# EAGLE board cpc_ram1mb_plcc84 (EAGLE 6.4)
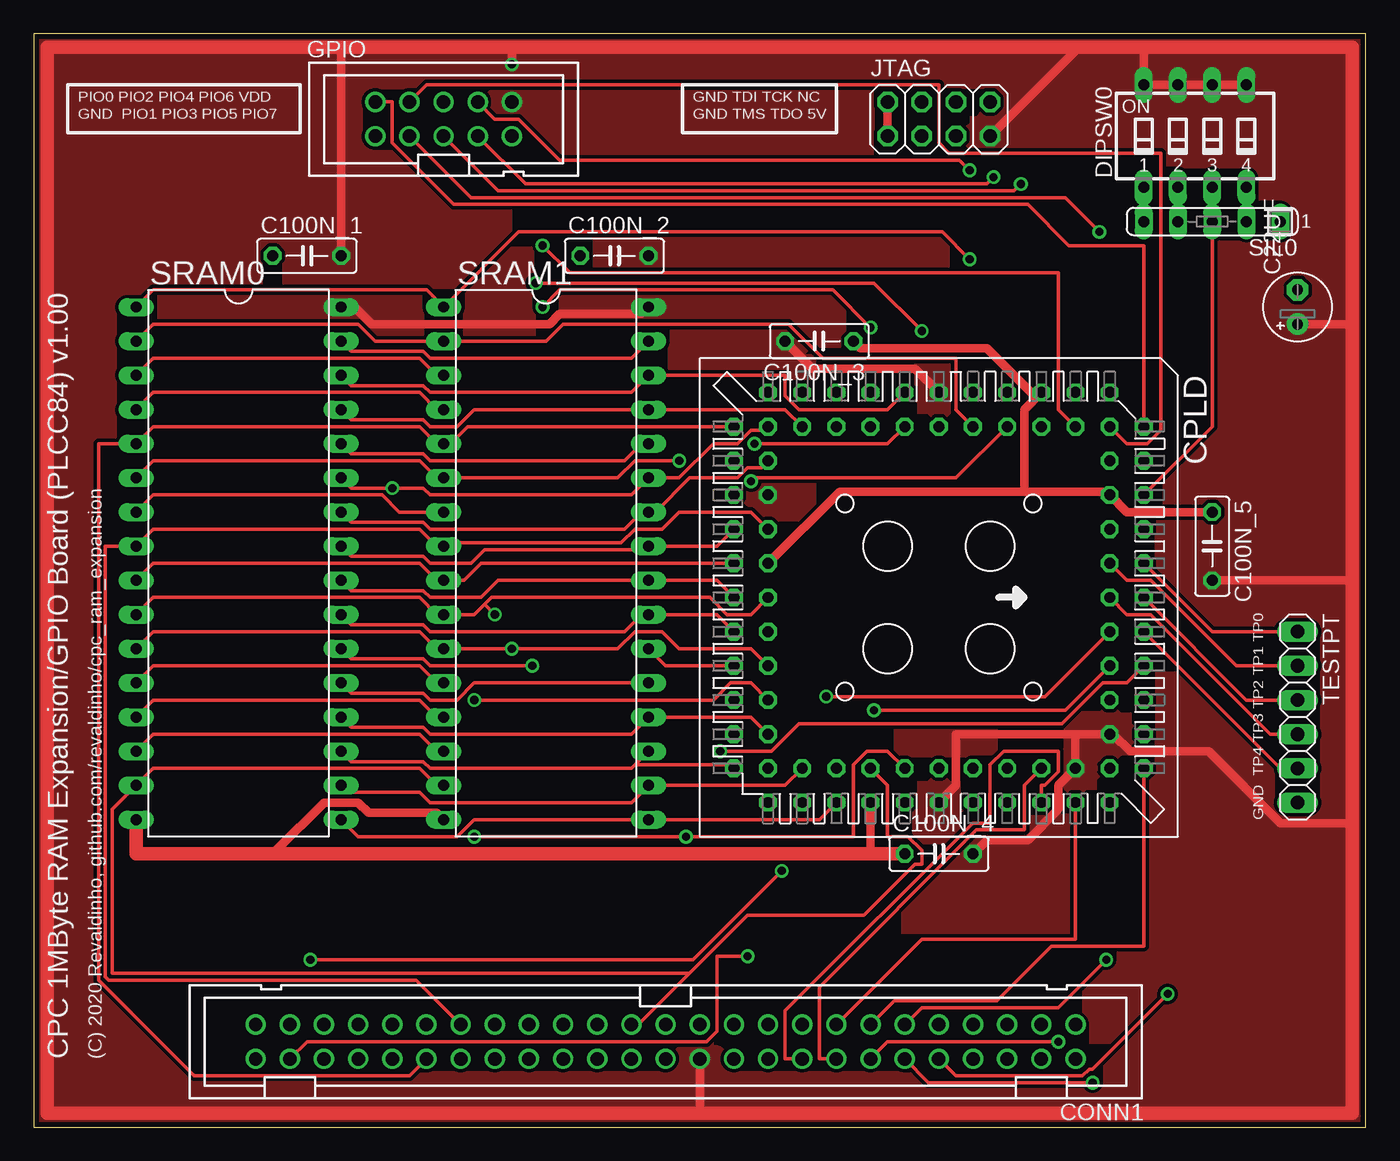
[diagram p0: board, top side]
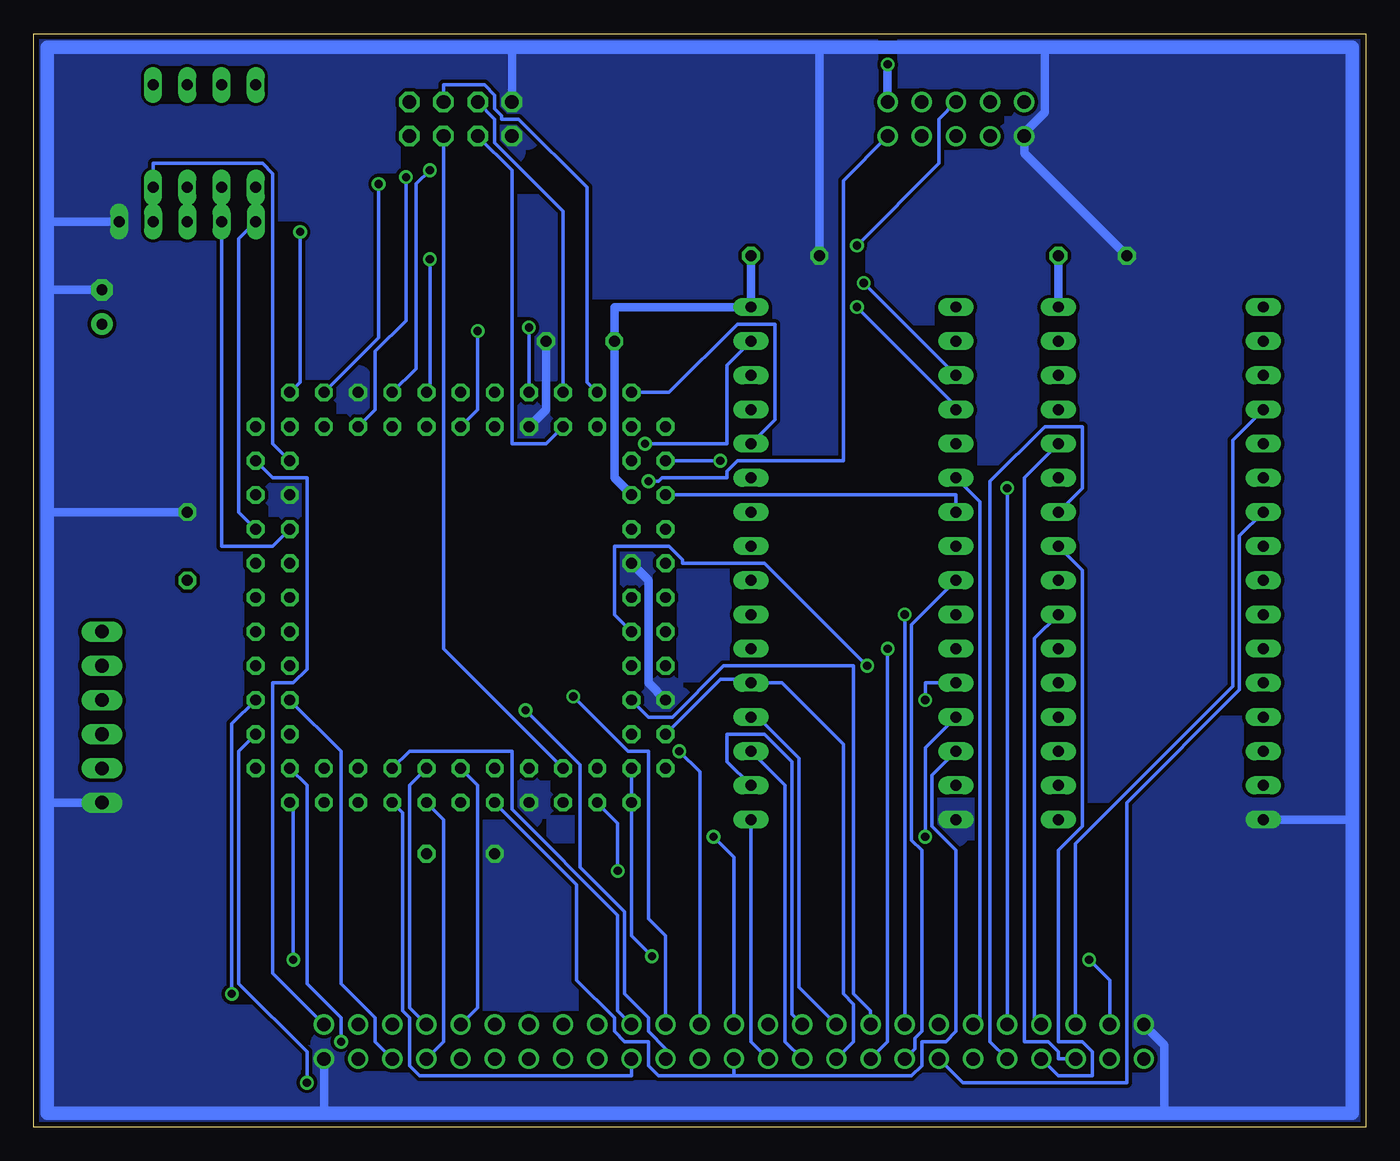
[diagram p1: board, bottom side, seen from below]

Size 99.06 x 81.28 mm. Coordinates in mm from the lower left corner, seen from the top.
Outline: 0,0 99.06,0 99.06,81.28 0,81.28 0,0
Copper layers (1*16): Top 0.035mm / dielectric 1.5mm / Bottom 0.035mm
Design rules "design_rules": minimum track width 10mil, minimum drill 24mil, track to track 10mil, track to pad 10mil, pad to pad 10mil, via to via 10mil, smd to smd 8mil, copper to edge 15mil, drill to drill 10mil, minimum pad ring 10mil, minimum via ring 8mil, stop-mask expansion 4mil, vias tented up to drill 0mil, thermal gap 10mil
Net classes: 0 signal: width 0.254 mm, clearance 0.254 mm; 1 supply: width 0.635 mm, clearance 0.254 mm

## Footprints (pad centres in the part's own frame; a part is rotated, then mirrored left to right if it is on the bottom)
E2,5-5 = drill 0.813 pad 1.6: + -1.27,0 | drill 0.813 pad 1.6 octagon: - 1.27,0
C050-025X075 = drill 0.813 octagon: 1 -2.54,0; 2 2.54,0
PAK100/2500-50 = drill 1 pad 1.422: 1 -30.48,-1.27; 2 -30.48,1.27; 3 -27.94,-1.27; 4 -27.94,1.27; 5 -25.4,-1.27; 6 -25.4,1.27; 7 -22.86,-1.27; 8 -22.86,1.27; 9 -20.32,-1.27; 10 -20.32,1.27; 11 -17.78,-1.27; 12 -17.78,1.27; 13 -15.24,-1.27; 14 -15.24,1.27; 15 -12.7,-1.27; 16 -12.7,1.27; 17 -10.16,-1.27; 18 -10.16,1.27; 19 -7.62,-1.27; 20 -7.62,1.27; 21 -5.08,-1.27; 22 -5.08,1.27; 23 -2.54,-1.27; 24 -2.54,1.27; 25 0,-1.27; 26 0,1.27; 27 2.54,-1.27; 28 2.54,1.27; 29 5.08,-1.27; 30 5.08,1.27; 31 7.62,-1.27; 32 7.62,1.27; 33 10.16,-1.27; 34 10.16,1.27; 35 12.7,-1.27; 36 12.7,1.27; 37 15.24,-1.27; 38 15.24,1.27; 39 17.78,-1.27; 40 17.78,1.27; 41 20.32,-1.27; 42 20.32,1.27; 43 22.86,-1.27; 44 22.86,1.27; 45 25.4,-1.27; 46 25.4,1.27; 47 27.94,-1.27; 48 27.94,1.27; 49 30.48,-1.27; 50 30.48,1.27
PLCC-S84-SOCKET = drill 0.813 octagon: 1 0,15.24; 2 0,12.7; 3 -2.54,15.24; 4 -2.54,12.7; 5 -5.08,15.24; 6 -5.08,12.7; 7 -7.62,15.24; 8 -7.62,12.7; 9 -10.16,15.24; 10 -10.16,12.7; 11 -12.7,15.24; 12 -15.24,12.7; 13 -12.7,12.7; 14 -15.24,10.16; 15 -12.7,10.16; 16 -15.24,7.62; 17 -12.7,7.62; 18 -15.24,5.08; 19 -12.7,5.08; 20 -15.24,2.54; 21 -12.7,2.54; 22 -15.24,0; 23 -12.7,0; 24 -15.24,-2.54; 25 -12.7,-2.54; 26 -15.24,-5.08; 27 -12.7,-5.08; 28 -15.24,-7.62; 29 -12.7,-7.62; 30 -15.24,-10.16; 31 -12.7,-10.16; 32 -15.24,-12.7; 33 -12.7,-15.24; 34 -12.7,-12.7; 35 -10.16,-15.24; 36 -10.16,-12.7; 37 -7.62,-15.24; 38 -7.62,-12.7; 39 -5.08,-15.24; 40 -5.08,-12.7; 41 -2.54,-15.24; 42 -2.54,-12.7; 43 0,-15.24; 44 0,-12.7; 45 2.54,-15.24; 46 2.54,-12.7; 47 5.08,-15.24; 48 5.08,-12.7; 49 7.62,-15.24; 50 7.62,-12.7; 51 10.16,-15.24; 52 10.16,-12.7; 53 12.7,-15.24; 54 15.24,-12.7; 55 12.7,-12.7; 56 15.24,-10.16; 57 12.7,-10.16; 58 15.24,-7.62; 59 12.7,-7.62; 60 15.24,-5.08; 61 12.7,-5.08; 62 15.24,-2.54; 63 12.7,-2.54; 64 15.24,0; 65 12.7,0; 66 15.24,2.54; 67 12.7,2.54; 68 15.24,5.08; 69 12.7,5.08; 70 15.24,7.62; 71 12.7,7.62; 72 15.24,10.16; 73 12.7,10.16; 74 15.24,12.7; 75 12.7,15.24; 76 12.7,12.7; 77 10.16,15.24; 78 10.16,12.7; 79 7.62,15.24; 80 7.62,12.7; 81 5.08,15.24; 82 5.08,12.7; 83 2.54,15.24; 84 2.54,12.7
SD4-04 = drill 0.813 long: 1 -3.81,-3.81; 2 -1.27,-3.81; 3 1.27,-3.81; 4 3.81,-3.81; 5 3.81,3.81; 6 1.27,3.81; 7 -1.27,3.81; 8 -3.81,3.81
PAK100/2500-10 = drill 1 pad 1.422: 1 -5.08,-1.27; 2 -5.08,1.27; 3 -2.54,-1.27; 4 -2.54,1.27; 5 0,-1.27; 6 0,1.27; 7 2.54,-1.27; 8 2.54,1.27; 9 5.08,-1.27; 10 5.08,1.27
2X04 = drill 1.016 octagon: 1 -3.81,-1.27; 2 -3.81,1.27; 3 -1.27,-1.27; 4 -1.27,1.27; 5 1.27,-1.27; 6 1.27,1.27; 7 3.81,-1.27; 8 3.81,1.27
SIL5 = drill 0.813 long: 1 -5.08,0; 2 -2.54,0; 3 0,0; 4 2.54,0; 5 5.08,0
DIL32 = drill 0.813 long: 1 -19.05,-7.62; 2 -16.51,-7.62; 3 -13.97,-7.62; 4 -11.43,-7.62; 5 -8.89,-7.62; 6 -6.35,-7.62; 7 -3.81,-7.62; 8 -1.27,-7.62; 9 1.27,-7.62; 10 3.81,-7.62; 11 6.35,-7.62; 12 8.89,-7.62; 13 11.43,-7.62; 14 13.97,-7.62; 15 16.51,-7.62; 16 19.05,-7.62; 17 19.05,7.62; 18 16.51,7.62; 19 13.97,7.62; 20 11.43,7.62; 21 8.89,7.62; 22 6.35,7.62; 23 3.81,7.62; 24 1.27,7.62; 25 -1.27,7.62; 26 -3.81,7.62; 27 -6.35,7.62; 28 -8.89,7.62; 29 -11.43,7.62; 30 -13.97,7.62; 31 -16.51,7.62; 32 -19.05,7.62
1X06 = drill 1.016 long: 1 -6.35,0; 2 -3.81,0; 3 -1.27,0; 4 1.27,0; 5 3.81,0; 6 6.35,0

## Placement (x,y rotation side)
C22UF  [E2,5-5]  93.98,60.96 90 top
C100N_1  [C050-025X075]  20.32,64.77 0 top
C100N_2  [C050-025X075]  43.18,64.77 0 top
C100N_3  [C050-025X075]  58.42,58.42 180 top
C100N_4  [C050-025X075]  67.31,20.32 0 top
C100N_5  [C050-025X075]  87.63,43.18 270 top
CONN1  [PAK100/2500-50]  46.99,6.35 180 top
CPLD  [PLCC-S84-SOCKET]  67.31,39.37 270 top
DIPSW0  [SD4-04]  86.36,73.66 0 top
GPIO  [PAK100/2500-10]  30.48,74.93 0 top
JTAG  [2X04]  67.31,74.93 0 top
SIL0  [SIL5]  87.63,67.31 180 top
SRAM0  [DIL32]  15.24,41.91 270 top
SRAM1  [DIL32]  38.1,41.91 270 top
TESTPT  [1X06]  93.98,30.48 270 top

## Library data of the parts
C22UF C100N_1-C100N_5 = resistor
CONN1 GPIO = con-3m
CPLD SRAM0 SRAM1 = ic-package
DIPSW0 = switch-dil
JTAG TESTPT = pinhead
SIL0 = resistor-sil

## Nets
A0: CONN1.33 CPLD.50 SRAM0.12 SRAM1.12
A1: CONN1.34 CPLD.48 SRAM0.11 SRAM1.11
A2: CONN1.35 CPLD.44 SRAM0.10 SRAM1.10
A3: CONN1.36 CPLD.41 SRAM0.9 SRAM1.9
A4: CONN1.37 CPLD.40 SRAM0.8 SRAM1.8
A5: CONN1.38 CPLD.37 SRAM0.7 SRAM1.7
A6: CONN1.39 CPLD.35 SRAM0.6 SRAM1.6
A7: CONN1.40 CPLD.33 SRAM0.5 SRAM1.5
A8: CONN1.41 CPLD.34 SRAM0.27 SRAM1.27
A9: CONN1.42 CPLD.36 SRAM0.26 SRAM1.26
A10: CONN1.43 CPLD.45 SRAM0.23 SRAM1.23
A11: CONN1.44 CPLD.39 SRAM0.25 SRAM1.25
A12: CONN1.45 CPLD.26 SRAM0.4 SRAM1.4
A13: CONN1.46 CPLD.32 SRAM0.28 SRAM1.28
A14: CONN1.47 CPLD.56
A15: CONN1.48 CPLD.54 CPLD.55
BUSACK_B: CONN1.13 CPLD.75
BUSREQ_B: CONN1.14 CPLD.76
BUSRESET_B: CONN1.11 CPLD.74
CLK: CONN1.1 CPLD.9
CURSOR: CONN1.5
D0: CONN1.25 CPLD.63 SRAM0.13 SRAM1.13
D1: CONN1.26 CPLD.62 SRAM0.14 SRAM1.14
D2: CONN1.27 CPLD.61 SRAM0.15 SRAM1.15
D3: CONN1.28 CPLD.58 SRAM0.17 SRAM1.17
D4: CONN1.29 CPLD.57 SRAM0.18 SRAM1.18
D5: CONN1.30 CPLD.53 SRAM0.19 SRAM1.19
D6: CONN1.31 CPLD.52 SRAM0.20 SRAM1.20
D7: CONN1.32 CPLD.51 SRAM0.21 SRAM1.21
DIP0: CPLD.5 DIPSW0.1 SIL0.5
DIP1: CPLD.6 DIPSW0.2 SIL0.4
DIP2: CPLD.7 DIPSW0.3 SIL0.3
DIP3: CPLD.10 DIPSW0.4 SIL0.2
EXP_B: CONN1.3
GPIO0: CPLD.11 GPIO.2
GPIO1: CPLD.12 GPIO.3
GPIO2: CPLD.13 GPIO.4
GPIO3: CPLD.14 GPIO.5
GPIO4: CPLD.15 GPIO.6
GPIO5: CPLD.17 GPIO.7
GPIO6: CPLD.18 GPIO.8
GPIO7: CPLD.19 GPIO.9
HALT_B: CONN1.17
HIADR0: CPLD.23 SRAM0.3 SRAM1.3
HIADR1: CPLD.25 SRAM0.31 SRAM1.31
HIADR2: CPLD.21 SRAM0.2 SRAM1.2
HIADR3: CPLD.24 SRAM0.30 SRAM1.30
HIADR4: CPLD.20 SRAM0.1 SRAM1.1
INT_B: CONN1.16 CPLD.71
IOREQ_B: CONN1.20 CPLD.68
LPEN: CONN1.4
M1_B: CONN1.22 CPLD.82
MREQ_B: CONN1.23 CPLD.81
NMI_B: CONN1.15 CPLD.72
RAMCS0_B: CPLD.46 SRAM0.22
RAMCS1_B: CPLD.47 SRAM1.22
RAMDIS: CONN1.6 CPLD.80
RAMOE_B: CPLD.43 SRAM0.24 SRAM1.24
RAMRD_B: CONN1.7 CPLD.67
RAMWE_B: CPLD.31 SRAM0.29 SRAM1.29
RD_B: CONN1.19 CPLD.69
READY: CONN1.12 CPLD.77
RESET_B: CONN1.10 CPLD.79
RFSH_B: CONN1.21 CPLD.84
ROMDIS: CONN1.8 CPLD.66
ROMEN_B: CONN1.9 CPLD.65
SOUND: CONN1.50
TCK: CPLD.30 JTAG.6
TDI: CPLD.28 JTAG.4
TDO: CPLD.59 JTAG.5
TMS: CPLD.29 JTAG.3
TP0: CPLD.3 TESTPT.1
TP1: CPLD.4 TESTPT.2
TP2: CPLD.1 TESTPT.3
TP3: CPLD.2 TESTPT.4
TP4: CPLD.83 TESTPT.5
VDD [supply]: C22UF.+ C100N_1.2 C100N_2.2 C100N_3.2 C100N_4.2 C100N_5.2 CONN1.24 CPLD.22 CPLD.38 CPLD.64 CPLD.73 CPLD.78 DIPSW0.5 DIPSW0.6 DIPSW0.7 DIPSW0.8 GPIO.10 JTAG.7 SRAM0.32 SRAM1.32
VSS [supply]: C22UF.- C100N_1.1 C100N_2.1 C100N_3.1 C100N_4.1 C100N_5.1 CONN1.2 CONN1.49 CPLD.8 CPLD.16 CPLD.27 CPLD.42 CPLD.49 CPLD.60 GPIO.1 JTAG.1 JTAG.2 SIL0.1 SRAM0.16 SRAM1.16 TESTPT.6
WR_B: CONN1.18 CPLD.70

## Tracks (layer width: path | path; a pad name or v marks a point on that pad's centre or on a via)
A0  (via drill 0.61)
  Top 0.254: SRAM0.12 8.89,34.29 28.7,34.29 29.97,33.02 SRAM1.12 | v32.77,31.75 50.55,31.75 51.82,33.02 53.34,33.02 CPLD.50
  Bottom 0.254: CPLD.50 53.34,30.48 51.56,30.48 47.75,34.29 38.1,34.29 38.1,9.91 36.83,8.64 CONN1.33 | SRAM1.12 32.77,33.02 v32.77,31.75
A1  (via drill 0.61)
  Top 0.254: SRAM0.11 8.89,36.83 28.7,36.83 29.97,35.56 SRAM1.11 v35.56,35.56 43.43,35.56 44.7,36.83 46.74,36.83 48.01,35.56 53.34,35.56 CPLD.48
  Bottom 0.254: CONN1.34 35.56,6.35 v35.56,35.56
A2  (via drill 0.61)
  Top 0.254: SRAM0.10 8.89,39.37 28.7,39.37 29.97,38.1 SRAM1.10 32.77,38.1 33.53,38.86 | CPLD.44 53.34,38.1 51.56,38.1 50.29,39.37 34.04,39.37 33.53,38.86 | 33.53,38.86 v34.29,38.1
  Bottom 0.254: v34.29,38.1 CONN1.35
A3
  Top 0.254: SRAM0.9 8.89,41.91 28.7,41.91 29.97,40.64 SRAM1.9 32,40.64 33.27,41.91 CPLD.41
  Bottom 0.254: CONN1.36 33.53,5.84 33.53,6.6 33.02,7.11 33.02,20.57 33.78,21.34 33.78,37.34 SRAM1.9
A4
  Top 0.254: 29.72,43.43 29.97,43.18 SRAM1.8 29.72,43.43 | 29.72,43.43 28.7,44.45 8.89,44.45 SRAM0.8 5.33,43.18 5.33,11.18 5.59,10.92 28.45,10.92 CONN1.37 | CPLD.40 53.34,45.72 48.01,45.72 46.74,44.45 44.7,44.45 43.69,43.43 29.72,43.43
A5
  Top 0.254: SRAM0.7 8.89,46.99 25.91,46.99 27.18,45.72 SRAM1.7
  Bottom 0.254: CPLD.37 30.48,46.99 SRAM1.7 | CONN1.38 29.97,3.3 17.78,3.3 17.78,24.13 9.4,32.51 9.4,43.94 SRAM0.7
A6  (via drill 0.61)
  Top 0.254: SRAM0.6 8.89,49.53 28.7,49.53 29.97,48.26 SRAM1.6 43.43,48.26 44.7,49.53 v48.01,49.53
  Bottom 0.254: v48.01,49.53 CPLD.35 | CONN1.39 28.7,8.13 28.7,46.48 SRAM1.6
A7
  Top 0.254: CPLD.33 32.26,52.07 30.99,50.8 SRAM1.5 29.97,50.8 28.7,52.07 8.89,52.07 SRAM0.5 4.83,50.8 4.83,10.92 11.94,3.81 27.94,3.81 CONN1.40
A8  (via drill 0.61)
  Top 0.254: SRAM0.27 23.62,47.5 v26.67,47.5 28.96,47.5 29.46,46.99 44.45,46.99 SRAM1.27 48.01,48.26 50.55,50.8 52.32,50.8 53.34,51.82 54.36,51.82 CPLD.34
  Bottom 0.254: v26.67,47.5 CONN1.41
A9
  Top 0.254: SRAM0.26 23.62,44.96 28.96,44.96 29.46,44.45 43.94,44.45 45.21,45.72 SRAM1.26 46.23,45.72 48.77,48.26 52.32,48.26 53.09,49.02 54.1,49.02 CPLD.36
  Bottom 0.254: CONN1.42 27.94,6.35 27.94,48.01 23.88,52.07 21.08,52.07 21.08,47.5 SRAM0.26
A10
  Top 0.254: SRAM0.23 23.62,37.34 28.96,37.34 29.46,36.83 43.94,36.83 45.21,38.1 SRAM1.23 50.8,38.1 CPLD.45
  Bottom 0.254: CONN1.43 24.64,8.13 24.64,36.32 SRAM0.23
A11
  Top 0.254: SRAM0.25 23.62,42.42 28.96,42.42 29.46,41.91 32.51,41.91 33.53,42.93 45.47,42.93 SRAM1.25 50.8,43.18 CPLD.39
  Bottom 0.254: CONN1.44 22.86,3.81 20.32,3.81 20.32,5.59 21.08,6.35 22.86,6.35 22.86,20.57 21.08,22.35 21.08,41.4 SRAM0.25
A12  (via drill 0.61)
  Top 0.254: SRAM0.4 8.89,54.61 28.7,54.61 29.97,53.34 SRAM1.4 | v62.23,59.44 59.44,62.23 39.12,62.23 v37.85,60.96
  Bottom 0.254: v62.23,59.44 CPLD.26 | v37.85,60.96 30.48,53.59 SRAM1.4 | CONN1.45 21.59,21.08 9.91,32.77 9.91,51.05 SRAM0.4
A13
  Top 0.254: SRAM0.28 23.62,50.04 28.96,50.04 29.46,49.53 43.94,49.53 45.21,50.8 SRAM1.28
  Bottom 0.254: CPLD.32 51.82,54.61 46.74,59.69 43.94,59.69 43.94,52.58 SRAM1.28 | CONN1.46 22.86,5.08 22.86,5.59 23.62,6.35 25.4,6.35 25.4,48.26 SRAM0.28
A14  (via drill 0.61)
  Top 0.254: v55.63,19.05 49.02,12.45 v20.57,12.45
  Bottom 0.254: CPLD.56 55.63,22.61 v55.63,19.05 | v20.57,12.45 19.05,10.92 CONN1.47
A15  (via drill 0.61)
  Top 0.254: CONN1.48 20.32,6.35 50.04,6.35 50.8,7.11 50.8,12.7 v53.09,12.7
  Bottom 0.254: CPLD.55 CPLD.54 54.61,14.22 v53.09,12.7
BUSACK_B
  Top 0.254: CPLD.75 82.55,13.46 75.69,13.46 71.63,9.4 64.01,9.4 CONN1.13
BUSREQ_B  (via drill 0.61)
  Top 0.254: v76.2,6.35 63.5,6.35 CONN1.14
  Bottom 0.254: CPLD.76 78.74,25.4 78.74,10.67 76.2,8.13 v76.2,6.35
BUSRESET_B  (via drill 0.61)
  Top 0.254: v79.76,12.45 76.2,8.89 66.04,8.89 CONN1.11
  Bottom 0.254: CPLD.74 79.76,23.88 v79.76,12.45
CLK
  Bottom 0.254: CPLD.9 81.28,48.26 78.74,48.26 78.74,34.04 79.76,33.02 81.28,33.02 81.28,11.43 CONN1.1
D0  (via drill 0.61)
  Top 0.254: SRAM0.13 8.89,31.75 28.7,31.75 29.97,30.48 SRAM1.13 | CPLD.63 63.5,27.94 61.98,27.94 60.96,26.92 60.96,21.59 v48.51,21.59 v32.77,21.59
  Bottom 0.254: v48.51,21.59 46.99,20.07 CONN1.25 | SRAM1.13 32.77,28.19 v32.77,21.59
D1
  Top 0.254: SRAM0.14 8.89,29.21 28.7,29.21 29.97,27.94 SRAM1.14
  Bottom 0.254: CPLD.62 58.67,18.03 58.67,10.92 55.88,8.13 55.88,7.11 55.12,6.35 53.34,6.35 53.34,4.57 52.58,3.81 46.99,3.81 | CONN1.26 46.99,3.81 | SRAM1.14 32.26,26.16 32.26,22.35 30.48,20.57 30.48,7.11 31.24,6.35 33.02,6.35 33.02,4.57 33.78,3.81 46.99,3.81
D2
  Top 0.254: SRAM1.15 29.97,25.4 28.7,26.67 8.89,26.67 SRAM0.15 5.84,23.62 5.84,11.43 48.77,11.43 | CPLD.61 63.5,25.4 63.5,21.59 65.02,21.59 66.04,20.57 66.04,19.56 65.53,19.56 61.72,15.75 53.09,15.75 48.77,11.43 | 48.77,11.43 44.96,7.62 CONN1.27
D3
  Top 0.254: SRAM0.17 24.13,21.59 31.5,21.59 32.77,22.86 SRAM1.17 58.42,22.86 CPLD.58
  Bottom 0.254: CONN1.28 45.72,6.35 SRAM1.17
D4
  Top 0.254: SRAM0.18 23.37,24.89 28.7,24.89 29.46,24.13 44.45,24.13 SRAM1.18 55.88,25.4 CPLD.57
  Bottom 0.254: CONN1.29 42.67,8.38 42.67,27.18 44.7,29.21 47.5,29.21 47.5,27.18 SRAM1.18
D5
  Top 0.254: SRAM0.19 23.62,27.18 28.96,27.18 29.46,26.67 44.45,26.67 44.7,26.92 | SRAM1.19 44.7,26.92 | CPLD.53 51.82,26.92 44.7,26.92
  Bottom 0.254: CONN1.30 43.18,6.35 43.18,25.4 SRAM1.19
D6
  Top 0.254: SRAM0.20 23.62,29.72 28.96,29.72 29.46,29.21 44.45,29.21 SRAM1.20 53.34,30.48 CPLD.52
  Bottom 0.254: CONN1.31 42.16,10.41 42.16,27.43 45.21,30.48 SRAM1.20
D7
  Top 0.254: SRAM0.21 23.62,32.26 28.96,32.26 29.46,31.75 31.5,31.75 32.77,33.02 SRAM1.21
  Bottom 0.254: CPLD.51 48.01,33.27 45.72,33.27 SRAM1.21 43.43,33.02 38.86,28.45 38.86,9.91 38.1,9.14 38.1,6.35 CONN1.32
DIP0
  Top 0.254: SIL0.5 DIPSW0.1
  Bottom 0.254: CPLD.5 83.82,45.72 83.82,66.04 SIL0.5
DIP1
  Top 0.254: SIL0.4 DIPSW0.2
  Bottom 0.254: CPLD.6 81.28,43.18 85.09,43.18 SIL0.4
DIP2
  Top 0.254: CPLD.7 87.63,52.07 SIL0.3 DIPSW0.3
DIP3
  Top 0.254: DIPSW0.4 SIL0.2
  Bottom 0.254: CPLD.10 81.28,50.8 81.28,70.87 82.04,71.63 90.17,71.63 DIPSW0.4
GPIO0
  Top 0.254: CPLD.11 82.55,65.53 76.96,65.53 73.91,68.58 31.24,68.58 26.67,73.15 26.67,76.2 GPIO.2
GPIO1  (via drill 0.61)
  Top 0.254: v79.25,66.55 76.71,69.09 32.51,69.09 GPIO.3
  Bottom 0.254: CPLD.12 79.25,55.37 v79.25,66.55
GPIO2
  Top 0.254: CPLD.13 81.28,50.8 82.8,50.8 83.82,51.82 83.82,72.39 68.07,72.39 67.31,73.15 67.31,77.47 29.21,77.47 GPIO.4
GPIO3  (via drill 0.61)
  Top 0.254: v73.41,70.1 72.9,69.6 34.54,69.6 GPIO.5
  Bottom 0.254: CPLD.14 73.41,58.67 v73.41,70.1
GPIO4  (via drill 0.61)
  Top 0.254: CPLD.15 76.2,53.34 76.2,63.5 39.88,63.5 v37.85,65.53
  Bottom 0.254: v37.85,65.53 31.75,71.63 31.75,74.93 GPIO.6
GPIO5  (via drill 0.61)
  Top 0.254: v71.37,70.61 70.87,70.1 36.58,70.1 GPIO.7
  Bottom 0.254: CPLD.17 73.66,53.34 73.66,57.66 71.37,59.94 v71.37,70.61
GPIO6  (via drill 0.61)
  Top 0.254: v69.6,71.12 68.83,71.88 39.12,71.88 36.07,74.93 34.29,74.93 GPIO.8
  Bottom 0.254: CPLD.18 70.61,56.39 70.61,70.1 v69.6,71.12
GPIO7  (via drill 0.61)
  Top 0.254: CPLD.19 68.58,48.26 53.59,48.26 v53.34,48.01
  Bottom 0.254: v53.34,48.01 52.58,48.01 52.32,48.26 47.5,48.26 47.5,48.77 46.74,49.53 38.86,49.53 38.86,70.36 GPIO.9
HIADR0  (via drill 0.61)
  Top 0.254: SRAM0.3 8.89,57.15 28.7,57.15 29.97,55.88 SRAM1.3 | v66.04,59.18 62.48,62.74 v37.34,62.74
  Bottom 0.254: CPLD.23 66.04,53.34 v66.04,59.18 | SRAM1.3 v37.34,62.74
HIADR1  (via drill 0.61)
  Top 0.254: SRAM0.31 23.62,57.66 28.96,57.66 29.46,57.15 44.45,57.15 SRAM1.31 | CPLD.25 63.5,50.8 v53.59,50.8
  Bottom 0.254: v53.59,50.8 47.5,50.8 47.5,56.64 SRAM1.31
HIADR2
  Top 0.254: SRAM0.2 8.89,59.69 24.13,59.69 25.4,58.42 SRAM1.2 38.1,58.42 39.37,59.69 56.13,59.69 58.67,57.15 68.58,57.15 68.58,53.34 CPLD.21
HIADR3
  Top 0.254: SRAM0.30 23.62,55.12 28.96,55.12 29.46,54.61 44.45,54.61 SRAM1.30 55.88,55.88 55.88,54.36 56.9,53.34 63.5,53.34 CPLD.24
HIADR4  (via drill 0.61)
  Top 0.254: SRAM0.1 8.89,62.23 29.21,62.23 SRAM1.1 36.07,66.55 67.56,66.55 v69.6,64.52
  Bottom 0.254: CPLD.20 69.6,54.86 v69.6,64.52
INT_B
  Top 0.254: CPLD.71 73.66,25.4 73.66,22.1 70.1,22.1 58.42,10.41 58.42,5.08 CONN1.16
IOREQ_B
  Bottom 0.254: CPLD.68 71.63,23.37 71.63,8.64 71.12,8.13 71.12,4.57 70.36,3.81 54.61,3.81 CONN1.20
M1_B  (via drill 0.61)
  Top 0.254: CPLD.82 76.71,30.99 v62.48,30.99
  Bottom 0.254: v62.48,30.99 58.42,26.92 58.42,19.3 55.12,16 55.12,9.91 53.34,8.13 53.34,7.11 52.07,5.84 CONN1.22
MREQ_B  (via drill 0.61)
  Top 0.254: CPLD.81 81.28,33.02 79.5,33.02 76.45,29.97 56.9,29.97 54.86,27.94 v51.05,27.94
  Bottom 0.254: v51.05,27.94 49.53,26.42 CONN1.23
NMI_B
  Top 0.254: CPLD.72 77.47,13.97 66.04,13.97 CONN1.15
RAMCS0_B  (via drill 0.61)
  Top 0.254: SRAM0.22 23.62,34.8 28.96,34.8 29.46,34.29 v37.08,34.29
  Bottom 0.254: v37.08,34.29 44.7,41.91 50.8,41.91 50.8,42.16 51.82,43.18 55.88,43.18 55.88,38.1 CPLD.46
RAMCS1_B
  Top 0.254: SRAM1.22 46.99,34.29 CPLD.47
RAMDIS
  Bottom 0.254: CPLD.80 76.2,27.94 76.2,10.67 73.66,8.13 73.66,6.35 CONN1.6
RAMOE_B
  Top 0.254: SRAM0.24 23.62,39.88 28.96,39.88 29.46,39.37 33.27,39.37 34.54,40.64 SRAM1.24 50.8,40.64 CPLD.43
RAMRD_B
  Bottom 0.254: CPLD.67 71.12,25.4 71.12,8.89 CONN1.7
RAMWE_B
  Top 0.254: SRAM0.29 23.62,52.58 28.96,52.58 29.46,52.07 31.5,52.07 32.77,53.34 SRAM1.29 55.88,53.34 CPLD.31
RD_B
  Bottom 0.254: CPLD.69 71.12,27.94 63.5,27.94 63.5,23.62 55.63,15.75 55.63,8.64 CONN1.19
READY  (via drill 0.61)
  Top 0.254: v78.74,3.3 66.55,3.3 CONN1.12
  Bottom 0.254: CPLD.77 83.82,27.94 83.82,10.67 78.74,5.59 v78.74,3.3
RESET_B  (via drill 0.61)
  Top 0.254: v84.33,9.91 78.74,4.32 78.49,4.32 77.98,3.81 68.58,3.81 CONN1.10
  Bottom 0.254: CPLD.79 84.33,29.97 v84.33,9.91
RFSH_B  (via drill 0.61)
  Top 0.254: CPLD.84 75.18,32 v58.93,32
  Bottom 0.254: v58.93,32 54.86,27.94 53.34,27.94 53.34,15.49 52.07,14.22 CONN1.21
ROMDIS
  Bottom 0.254: CPLD.66 68.58,22.86 68.58,6.35 CONN1.8
ROMEN_B
  Bottom 0.254: CPLD.65 66.04,25.4 66.04,8.89 CONN1.9
TCK
  Bottom 0.254: CPLD.30 57.91,55.37 57.91,69.85 62.99,74.93 64.26,74.93 64.26,75.18 64.77,75.69 64.77,76.71 65.53,77.47 68.58,77.47 JTAG.6
TDI
  Bottom 0.254: CPLD.28 59.69,68.07 64.77,73.15 64.77,74.93 JTAG.4
TDO
  Bottom 0.254: CPLD.59 68.58,35.56 JTAG.5
TMS
  Bottom 0.254: CPLD.29 60.96,50.8 63.5,50.8 63.5,71.12 JTAG.3
TP0
  Top 0.254: CPLD.3 87.63,36.83 TESTPT.1
TP1
  Top 0.254: CPLD.4 81.28,40.64 83.06,40.64 89.41,34.29 TESTPT.2
TP2
  Top 0.254: CPLD.1 90.17,31.75 TESTPT.3
TP3
  Top 0.254: CPLD.2 81.28,38.1 83.06,38.1 91.95,29.21 TESTPT.4
TP4
  Top 0.254: CPLD.83 92.71,26.67 TESTPT.5
VDD  (via drill 0.61)
  Top 0.635: CPLD.22 65.53,56.39 57.91,56.39 C100N_3.2 | C100N_4.2 70.87,21.34 73.91,21.34 76.2,23.62 76.2,25.4 CPLD.73 77.47,29.21 | CPLD.64 68.58,25.4 68.58,29.21 77.47,29.21 | 77.47,29.21 CPLD.78 80.26,29.21 81.53,27.94 87.38,27.94 92.71,22.61 98.04,22.61 | 82.55,80.26 DIPSW0.8 DIPSW0.7 DIPSW0.6 DIPSW0.5 | 98.04,40.64 C100N_5.2 | 49.53,1.02 CONN1.24 | 35.56,80.26 v35.56,78.99 | JTAG.7 77.47,80.01 77.47,80.26 | 98.04,59.69 C22UF.+ | 22.86,80.26 C100N_1.2 | SRAM1.32 45.21,60.45 39.12,60.45 38.35,59.69 25.15,59.69 23.88,60.96 SRAM0.32
  Top 1.016: 1.02,1.02 49.53,1.02 98.04,1.02 98.04,22.61 98.04,40.64 98.04,59.69 98.04,80.26 82.55,80.26 77.47,80.26 35.56,80.26 22.86,80.26 1.02,80.26 1.02,1.02
  Bottom 0.635: C100N_2.2 SRAM1.32 55.88,60.96 C100N_3.2 55.88,48.26 CPLD.38 | C100N_1.2 SRAM0.32 | v35.56,78.99 GPIO.10
  pour Top: 0,0 0,81.28 99.06,81.28 99.06,0
VSS
  Top 0.635: C100N_5.1 81.28,45.72 CPLD.8 80.01,47.24 73.66,47.24 | 73.66,47.24 73.66,53.34 CPLD.16 74.42,54.36 70.87,57.91 61.47,57.91 C100N_3.1 | CPLD.42 59.94,47.24 73.66,47.24 | SRAM1.16 29.97,23.37 24.89,23.37 24.13,24.13 21.59,24.13 18.03,20.57 18.03,20.32 | 62.23,20.32 CPLD.60 | JTAG.2 JTAG.1
  Top 1.016: SRAM0.16 7.62,20.32 18.03,20.32 62.23,20.32 C100N_4.1
  Bottom 0.635: CPLD.49 53.34,33.02 53.34,40.64 CPLD.42 | CPLD.27 60.96,53.34 C100N_3.1 | C100N_1.1 25.4,72.39 GPIO.1 25.4,73.91 23.88,75.44 23.88,80.26 | 40.64,80.26 C100N_2.1 | 98.04,67.31 SIL0.1 | CONN1.49 14.99,6.1 14.99,1.02 | 77.47,1.02 CONN1.2 | 98.04,24.13 TESTPT.6 | 98.04,62.23 C22UF.- | 63.5,80.26 JTAG.2 | 1.02,22.86 SRAM0.16 | 98.04,45.72 C100N_5.1
  Bottom 1.016: 1.02,1.02 14.99,1.02 77.47,1.02 98.04,1.02 98.04,24.13 98.04,45.72 98.04,62.23 98.04,67.31 98.04,80.26 63.5,80.26 40.64,80.26 23.88,80.26 1.02,80.26 1.02,22.86 1.02,1.02
  pour Bottom: 0,0 0,81.28 99.06,81.28 99.06,0
WR_B
  Top 0.254: CPLD.70 74.93,25.4 75.18,25.4 76.2,26.42 76.2,27.94 72.14,27.94 71.12,26.92 71.12,22.61 69.85,22.61 55.88,8.64 55.88,5.08 CONN1.18

## Text on the board
tPlace: PIO0 PIO2 PIO4 PIO6 VDD | GND TDI TCK NC | GND PIO1 PIO3 PIO5 PIO7 | GND TMS TDO 5V | GND TP4 TP3 TP2 TP1 TP0 | CPC 1MByte RAM Expansion/GPIO Board (PLCC84) v1.00 | (C) 2020 Revaldinho, github.com/revaldinho/cpc_ram_expansion